# EAGLE board circuit (EAGLE 9.7.0)

Size 98.17 x 113.75 mm. Coordinates in mm from the lower left corner, seen from the top.
Outline: 0,0 98.17,0 98.17,113.75 0,113.75 0,0
Copper layers (1*16): Top 0.035mm / dielectric 1.5mm / Bottom 0.035mm
Design rules "default": minimum track width 6mil, minimum drill 0.35mm, track to track 6mil, track to pad 6mil, pad to pad 6mil, via to via 6mil, smd to smd 6mil, copper to edge 40mil, drill to drill 6mil, minimum pad ring 10mil, minimum via ring 8mil, stop-mask expansion 4mil, vias tented up to drill 0mil, thermal gap 10mil

## Footprints (pad centres in the part's own frame; a part is rotated, then mirrored left to right if it is on the bottom)
1X08 = drill 1.016 long: 1 -8.89,0; 2 -6.35,0; 3 -3.81,0; 4 -1.27,0; 5 1.27,0; 6 3.81,0; 7 6.35,0; 8 8.89,0
RESAD1016W63L850D250B = drill 0.83 pad 1.43: 1 -5.08,0; 2 5.08,0
ARDUINO-UNO-R3-SHIELD = drill 1.016 pad 1.88: 3.3V 24.13,-2.54; 5V 24.13,0; A0 24.13,12.7; A1 24.13,15.24; A2 24.13,17.78; A3 24.13,20.32; A4 24.13,22.86; A5 24.13,25.4; AREF -24.13,-13.97; D2 -24.13,20.32; D3 -24.13,17.78; D4 -24.13,15.24; D5 -24.13,12.7; D6 -24.13,10.16; D7 -24.13,7.62; D8 -24.13,3.81; D9 -24.13,1.27; D10 -24.13,-1.27; D11 -24.13,-3.81; D12 -24.13,-6.35; D13 -24.13,-8.89; GND@0 24.13,2.54; GND@1 24.13,5.08; GND@2 -24.13,-11.43; IOREF 24.13,-7.62; NC 24.13,-10.16; RES 24.13,-5.08; RX -24.13,25.4; SCL -24.13,-19.05; SDA -24.13,-16.51; TX -24.13,22.86; VIN 24.13,7.62

## Placement (x,y rotation side)
JP1  PINHD-1X08_1X08M  [1X08]  6.35,93.66 270 top
R1  1k  [RESAD1016W63L850D250B]  87.78,104.78 90 top
R2  1k  [RESAD1016W63L850D250B]  80.16,104.78 90 top
R3  1k  [RESAD1016W63L850D250B]  77.62,102.23 90 top
R4  1k  [RESAD1016W63L850D250B]  85.24,102.23 90 top
R5  1k  [RESAD1016W63L850D250B]  75.08,104.78 90 top
R6  1k  [RESAD1016W63L850D250B]  82.7,102.23 90 top
U1  ARDUINO-UNO-R3-SHIELD  [ARDUINO-UNO-R3-SHIELD]  63.65,29.84 270 top

## Library data of the parts
JP1 R1-R6 U1 = Tinkercad

## Nets
U1_5V: R3.2 R4.2 R6.2 U1.5V
U1_A1: R3.1 U1.A1
U1_A2: R2.1 U1.A2
U1_A3: R5.1 R6.1 U1.A0 U1.A3
U1_A4: R4.1 U1.A4
U1_A5: R1.1 U1.A5
U1_D11: JP1.3 JP1.4 U1.D11
U1_GND: R1.2 R2.2 R5.2 U1.GND@0 U1.GND@1 U1.GND@2
U1_VIN: JP1.2 JP1.5 U1.VIN

## Tracks (layer width: path | path; a pad name or v marks a point on that pad's centre or on a via)
U1_5V  (3 unrouted)
U1_A1  (1 unrouted)
U1_A2  (1 unrouted)
U1_A3  (3 unrouted)
U1_A4  (1 unrouted)
U1_A5  (1 unrouted)
U1_D11  (2 unrouted)
U1_GND  (5 unrouted)
U1_VIN  (2 unrouted)